# EAGLE board vceg (EAGLE 7.1.0)
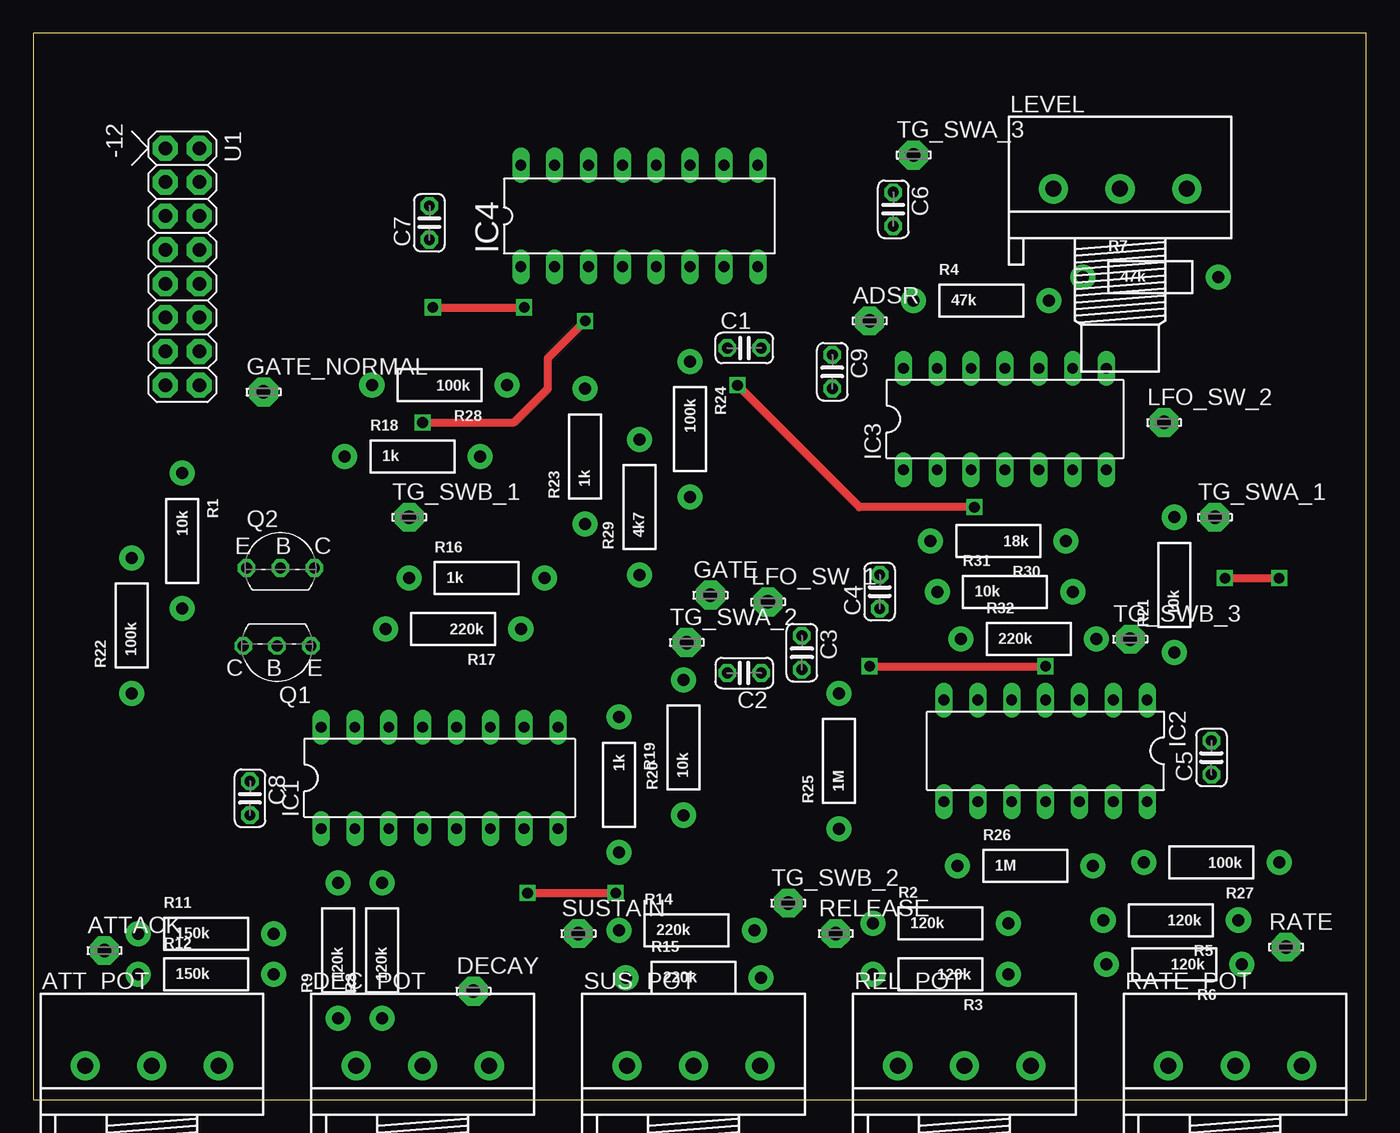
[diagram p0: board, top side]
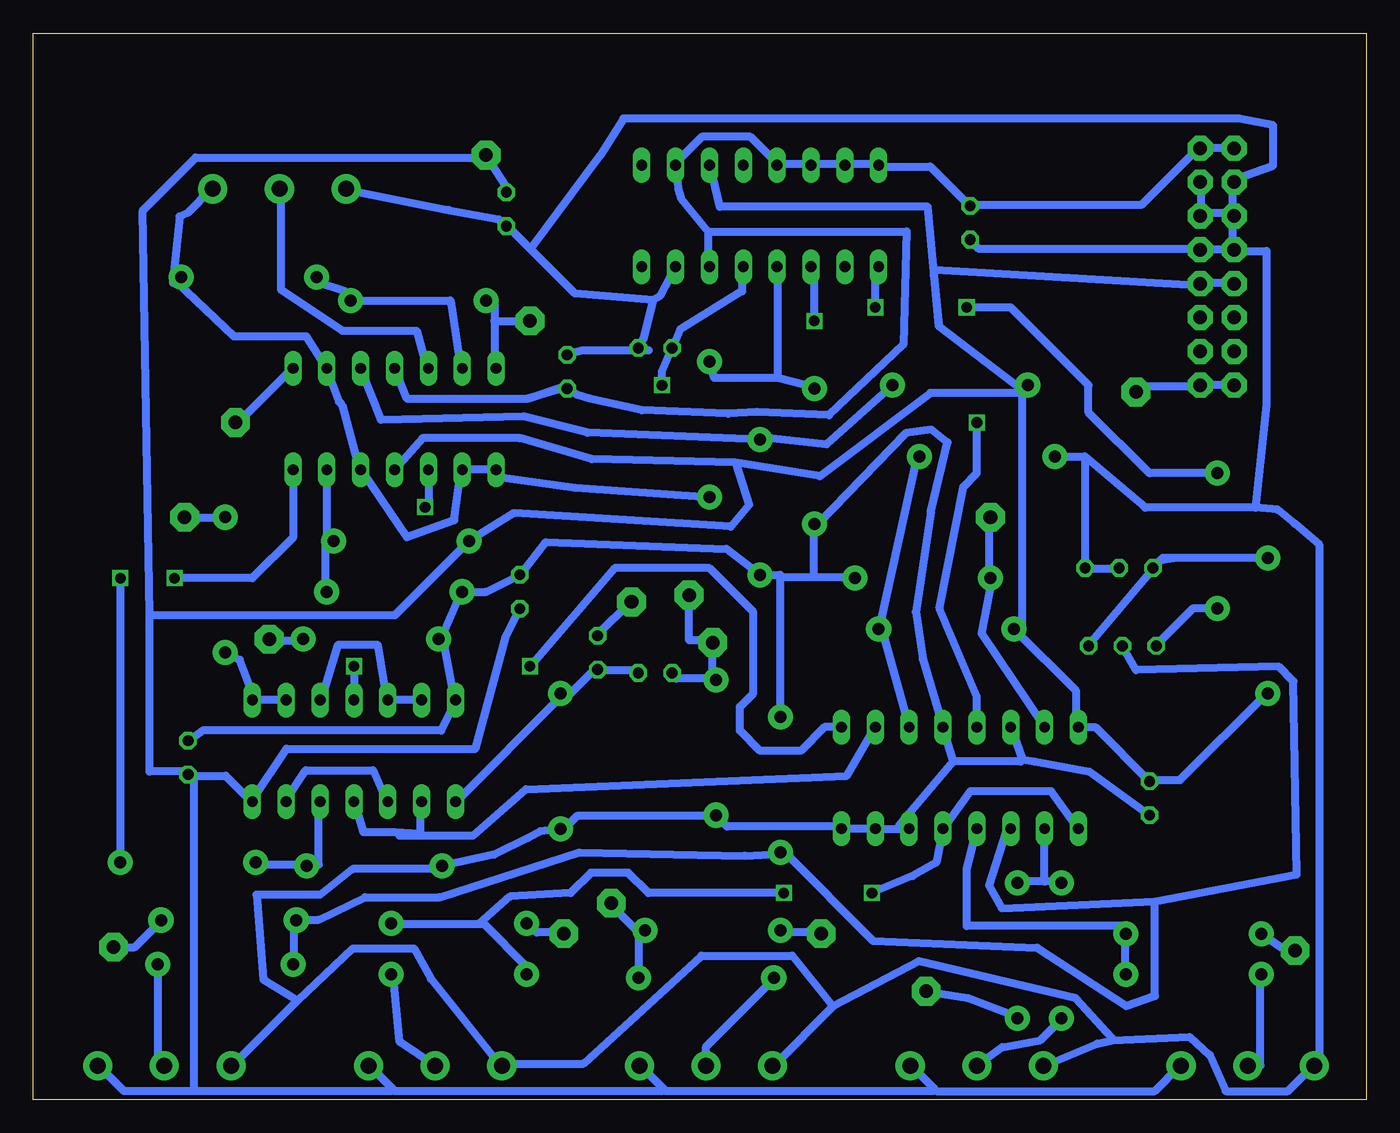
[diagram p1: board, bottom side, seen from below]

Size 100 x 80 mm. Coordinates in mm from the lower left corner, seen from the top.
Outline: 0,0 100,0 100,80 0,80 0,0
Copper layers (1*16): Top 0.035mm / dielectric 1.5mm / Bottom 0.035mm
Design rules "default *": minimum track width 24mil, minimum drill 24mil, track to track 14mil, track to pad 14mil, pad to pad 14mil, via to via 14mil, smd to smd 8mil, copper to edge 0mil, drill to drill 8mil, minimum pad ring 10mil, minimum via ring 8mil, stop-mask expansion 4mil, vias tented up to drill 0mil, thermal gap 10mil

## Footprints (pad centres in the part's own frame; a part is rotated, then mirrored left to right if it is on the bottom)
LSP10 = drill 1.016 pad 2.159 octagon: MP 0,0
3RP/1610N = drill 1.2 pad 2.184: 1 -5,0; 2 0,0; 3 5,0
C025-024X044 = drill 0.813 octagon: 1 -1.27,0; 2 1.27,0
DIL16 = drill 0.813 long: 1 -8.89,-3.81; 2 -6.35,-3.81; 3 -3.81,-3.81; 4 -1.27,-3.81; 5 1.27,-3.81; 6 3.81,-3.81; 7 6.35,-3.81; 8 8.89,-3.81; 9 8.89,3.81; 10 6.35,3.81; 11 3.81,3.81; 12 1.27,3.81; 13 -1.27,3.81; 14 -3.81,3.81; 15 -6.35,3.81; 16 -8.89,3.81
DIL14 = drill 0.813 long: 1 -7.62,-3.81; 2 -5.08,-3.81; 3 -2.54,-3.81; 4 0,-3.81; 5 2.54,-3.81; 6 5.08,-3.81; 7 7.62,-3.81; 8 7.62,3.81; 9 5.08,3.81; 10 2.54,3.81; 11 0,3.81; 12 -2.54,3.81; 13 -5.08,3.81; 14 -7.62,3.81
TO92-CBE = drill 0.813 octagon: B 0,0; C 2.54,0; E -2.54,0
AXIAL-0.4 = drill 0.9 pad 1.88: P$1 -5.08,0; P$2 5.08,0
POWER_16 = drill 1.016 pad 1.88 octagon: 1 -6.35,-1.27; 2 -6.35,1.27; 3 -3.81,-1.27; 4 -3.81,1.27; 5 -1.27,-1.27; 6 -1.27,1.27; 7 1.27,-1.27; 8 1.27,1.27; 9 3.81,-1.27; 10 3.81,1.27; 11 6.35,-1.27; 12 6.35,1.27; 13 8.89,-1.27; 14 8.89,1.27; 15 11.43,-1.27; 16 11.43,1.27

## Placement (x,y rotation side)
ADSR  LSP10  [LSP10]  62.74,58.42 0 top
ATT_POT  50k  [3RP/1610N]  8.89,2.54 0 top
ATTACK  LSP10  [LSP10]  5.33,11.18 0 top
C1  .05  [C025-024X044]  53.34,56.39 0 top
C2  .01  [C025-024X044]  53.34,32 180 top
C3  .01  [C025-024X044]  57.66,33.53 270 top
C4  .1  [C025-024X044]  63.5,38.1 90 top
C5  .1  [C025-024X044]  88.39,25.65 90 top
C6  .1  [C025-024X044]  64.52,66.8 270 top
C7  .1  [C025-024X044]  29.72,65.79 90 top
C8  .1  [C025-024X044]  16.26,22.61 270 top
C9  .1  [C025-024X044]  59.94,54.61 270 top
DEC_POT  50k  [3RP/1610N]  29.21,2.54 0 top
DECAY  LSP10  [LSP10]  33.02,8.13 0 top
GATE  LSP10  [LSP10]  50.8,37.85 0 top
GATE_NORMAL  LSP10  [LSP10]  17.27,53.09 0 top
IC1  4052N  [DIL16]  30.48,24.13 0 top
IC2  4001N  [DIL14]  75.95,26.16 180 top
IC3  TL074P  [DIL14]  72.9,51.05 0 top
IC4  LM13700N  [DIL16]  45.47,66.29 0 top
LEVEL  50k  [3RP/1610N]  81.53,68.33 0 top
LFO_SW_1  LSP10  [LSP10]  55.12,37.34 0 top
LFO_SW_2  LSP10  [LSP10]  84.84,50.8 0 top
Q1  2N3906INLINE  [TO92-CBE]  18.29,34.04 180 top
Q2  2N3906INLINE  [TO92-CBE]  18.54,39.88 0 top
R1  10k  [AXIAL-0.4]  11.18,41.91 270 top
R2  120k  [AXIAL-0.4]  68.07,13.21 0 top
R3  120k  [AXIAL-0.4]  68.07,9.4 180 top
R4  47k  [AXIAL-0.4]  71.12,59.94 0 top
R5  120k  [AXIAL-0.4]  85.34,13.46 180 top
R6  120k  [AXIAL-0.4]  85.6,10.16 180 top
R7  47k  [AXIAL-0.4]  83.82,61.72 0 top
R8  120k  [AXIAL-0.4]  26.16,11.18 90 top
R9  120k  [AXIAL-0.4]  22.86,11.18 90 top
R11  150k  [AXIAL-0.4]  12.95,12.45 0 top
R12  150k  [AXIAL-0.4]  12.95,9.4 0 top
R14  220k  [AXIAL-0.4]  49.02,12.7 0 top
R15  220k  [AXIAL-0.4]  49.53,9.14 0 top
R16  1k  [AXIAL-0.4]  33.27,39.12 0 top
R17  220k  [AXIAL-0.4]  31.5,35.31 180 top
R18  1k  [AXIAL-0.4]  28.45,48.26 0 top
R19  1k  [AXIAL-0.4]  43.94,23.62 270 top
R20  10k  [AXIAL-0.4]  48.77,26.42 90 top
R21  10k  [AXIAL-0.4]  85.6,38.61 90 top
R22  100k  [AXIAL-0.4]  7.37,35.56 90 top
R23  1k  [AXIAL-0.4]  41.4,48.26 90 top
R24  100k  [AXIAL-0.4]  49.28,50.29 270 top
R25  1M  [AXIAL-0.4]  60.45,25.4 90 top
R26  1M  [AXIAL-0.4]  74.42,17.53 0 top
R27  100k  [AXIAL-0.4]  88.39,17.78 180 top
R28  100k  [AXIAL-0.4]  30.48,53.59 180 top
R29  4k7  [AXIAL-0.4]  45.47,44.45 90 top
R30  18k  [AXIAL-0.4]  72.39,41.91 180 top
R31  10k  [AXIAL-0.4]  72.9,38.1 0 top
R32  220k  [AXIAL-0.4]  74.68,34.54 0 top
RATE  LSP10  [LSP10]  93.98,11.43 0 top
RATE_POT  50k  [3RP/1610N]  90.17,2.54 0 top
REL_POT  50k  [3RP/1610N]  69.85,2.54 0 top
RELEASE  LSP10  [LSP10]  60.2,12.45 0 top
SUS_POT  50k  [3RP/1610N]  49.53,2.54 0 top
SUSTAIN  LSP10  [LSP10]  40.89,12.45 0 top
TG_SWA_1  LSP10  [LSP10]  88.65,43.69 0 top
TG_SWA_2  LSP10  [LSP10]  49.02,34.29 0 top
TG_SWA_3  LSP10  [LSP10]  66.04,70.87 0 top
TG_SWB_1  LSP10  [LSP10]  28.19,43.69 0 top
TG_SWB_2  LSP10  [LSP10]  56.64,14.73 0 top
TG_SWB_3  LSP10  [LSP10]  82.3,34.54 0 top
U1  POWER  [POWER_16]  11.18,65.02 270 top

## Library data of the parts
ADSR ATTACK DECAY GATE GATE_NORMAL LFO_SW_1 LFO_SW_2 RATE RELEASE SUSTAIN TG_SWA_1-TG_SWA_3 TG_SWB_1-TG_SWB_3 = solpad
ATT_POT DEC_POT LEVEL RATE_POT REL_POT SUS_POT = pot
C1-C9 = rcl
IC1 IC2 = 40xx
IC3 = linear
IC4 = synthdiy
Q1 Q2 = bt_transistor
R1-R9 R11 R12 R14-R32 = SparkFun-Resistors
U1 = eurorack

## Nets
+12V: ATT_POT.3 C4.1 C5.1 C6.1 C8.1 DEC_POT.3 IC1.16 IC2.14 IC3.4 IC4.11 R17.P$2 R22.P$1 R28.P$2 R30.P$2 RATE_POT.3 REL_POT.3 SUS_POT.3 TG_SWA_3.MP U1.9 U1.10
-12V: C7.2 C9.2 IC3.11 IC4.6 IC4.10 IC4.13 IC4.14 IC4.15 IC4.16 U1.1 U1.2
GND: ATT_POT.1 C1.2 C4.2 C5.2 C6.2 C7.1 C8.2 C9.1 DEC_POT.1 IC1.6 IC1.7 IC1.8 IC1.12 IC1.14 IC2.7 IC4.7 LEVEL.1 Q2.B Q2.C R16.P$2 R18.P$1 R19.P$1 R20.P$1 R23.P$1 R25.P$1 R26.P$1 R29.P$1 R31.P$1 R32.P$1 RATE_POT.1 REL_POT.1 SUS_POT.1 U1.3 U1.4 U1.5 U1.6 U1.7 U1.8
N$1: R2.P$1 RELEASE.MP
N$2: IC1.1 IC1.5 R2.P$2 R3.P$2
N$3: R3.P$1 REL_POT.2
N$4: R5.P$1 RATE.MP
N$5: IC1.3 Q1.B R5.P$2 R6.P$2 R19.P$2
N$6: R6.P$1 RATE_POT.2
N$7: DECAY.MP R8.P$1
N$8: IC1.2 R8.P$2 R9.P$2
N$9: DEC_POT.2 R9.P$1
N$10: ATTACK.MP R11.P$1
N$11: IC1.4 R11.P$2 R12.P$2
N$12: ATT_POT.2 R12.P$1
N$13: R14.P$1 SUSTAIN.MP
N$14: IC1.15 R16.P$1 TG_SWB_1.MP
N$15: R15.P$1 SUS_POT.2
N$16: IC1.11 R17.P$1 R18.P$2
N$17: IC1.10 IC2.9 IC2.11
N$18: IC2.1 IC2.2 R21.P$1
N$19: IC2.3 IC2.5 IC2.6
N$20: IC1.9 IC2.4
N$21: Q1.C R1.P$2
N$22: Q1.E Q2.E R22.P$2
N$23: GATE_NORMAL.MP U1.15 U1.16
N$24: IC4.4 R23.P$2 R24.P$1
N$25: C2.1 C3.2 IC2.8 R25.P$2
N$26: IC3.1 IC3.2 IC3.5 IC3.9 LEVEL.3 R7.P$2 R24.P$2
N$27: C2.2 GATE.MP R20.P$2 TG_SWA_2.MP
N$28: C1.1 IC3.3 IC4.5
N$29: IC3.7 R27.P$1
N$30: IC2.10 IC2.13
N$31: IC2.12 R26.P$2 R27.P$2
N$32: IC3.8 LFO_SW_2.MP
N$33: IC3.6 R30.P$1 R31.P$2
N$34: IC3.10 R28.P$1 R29.P$2
N$35: C3.1 LFO_SW_1.MP
N$36: R14.P$2 R15.P$2 TG_SWB_2.MP
N$37: R32.P$2 TG_SWB_3.MP
N$38: R21.P$2 TG_SWA_1.MP
N$39: IC4.1 R1.P$1
N$40: IC3.12 LEVEL.2
N$41: IC1.13 IC4.3
N$42: ADSR.MP IC3.14 R4.P$1
N$43: IC3.13 R4.P$2 R7.P$1

## Tracks (layer width: path | path; a pad name or v marks a point on that pad's centre or on a via)
+12V
  Bottom 0.61: R22.P$1 7.46,30.48 13.97,23.97 16.03,23.97 C8.1 20.32,27.94 IC1.16 21.75,28.1 21.75,30.64 R17.P$2 25.84,35.56 25.84,52.86 R28.P$2 | U1.9 10,61.28 12.38,61.28 U1.10 12.7,61.12 32.38,62.26 32.42,61.75 32.07,58.04 | 32.07,58.04 32.89,66.99 48.48,66.99 49.21,70.01 IC4.11 | 32.07,58.04 25.72,53.18 R28.P$2 | 47.31,47.78 40.99,46.77 32.7,53.02 25.88,53.02 R28.P$2 | 47.31,47.78 58.1,48.04 63.5,49.62 70.8,49.62 72.87,47.31 IC3.4 | 47.31,47.78 46.29,44.61 47.66,42.99 63.94,44.01 R30.P$2 72.87,36.35 91.28,36.35 | C6.1 64.83,68.07 64.58,68.55 65.72,70.33 TG_SWA_3.MP 66.29,70.67 87.82,70.67 91.79,66.71 91.28,36.35 | C5.1 88.27,24.29 85.57,24.29 83.66,22.38 IC2.14 83.5,22.54 80.99,26.32 66.83,26.32 64.55,34.77 C4.1 | 91.28,36.35 91.28,24.61 88.58,24.61 C5.1 | 32.38,0.79 34.13,2.54 DEC_POT.3 | 32.38,0.79 32.23,0.64 15.88,0.64 13.97,2.54 ATT_POT.3 | 52.7,0.79 52.55,0.64 32.54,0.64 32.38,0.79 | 52.7,0.79 54.45,2.54 SUS_POT.3 | 73.03,0.79 72.87,0.64 52.86,0.64 52.7,0.79 | 73.03,0.79 74.77,2.54 REL_POT.3 | 87.95,0.64 73.18,0.64 73.03,0.79 | 87.95,0.64 93.19,0.64 95.09,2.54 RATE_POT.3 | 87.95,0.64 87.95,24.13 C5.1
-12V
  Bottom 0.61: 62.9,52.61 60.23,53.5 C9.2 | 62.9,52.61 71.98,52.61 72.87,54.77 IC3.11 | 49.37,65.12 51.4,67.6 51.63,68.36 51.75,70.01 IC4.10 51.75,70.33 49.85,72.23 46.2,72.23 44.29,70.33 IC4.13 44.13,70.17 41.91,70.17 IC4.14 41.59,70.17 39.37,70.17 IC4.15 39.05,70.17 36.83,70.17 IC4.16 36.51,70.01 32.7,70.01 29.84,67.15 C7.2 29.53,67.15 16.83,67.15 12.7,71.28 U1.2 12.38,71.44 10,71.44 U1.1 | 49.37,65.12 49.37,62.55 IC4.6 | 49.37,65.12 34.48,65.12 34.73,56.64 40.29,51.34 45.72,51.59 47.88,51.47 54.36,51.72 58.29,52.61 59.18,52.86 59.94,53.47 62.9,52.61
GND
  Bottom 0.61: LEVEL.1 76.52,68.26 68.83,66.74 65.09,66.04 C6.2 64.77,65.88 62.71,63.82 | 53.5,59.98 52.99,60.29 IC4.7 | 53.5,59.98 54.26,57.02 C1.2 53.82,56.2 58.8,56.2 C9.1 | 62.71,63.82 59.37,60.48 53.5,59.98 | Q2.B 18.57,39.85 20.95,39.85 Q2.C 21.11,40.16 21.11,48.26 | R18.P$1 21.11,48.26 | C7.1 29.69,64.45 29.05,63.82 12.54,63.82 U1.8 12.22,63.82 10,63.82 U1.7 | U1.5 10,66.2 10,63.98 U1.7 | U1.5 10,66.52 10,68.74 U1.3 9.84,69.06 6.99,70.07 6.99,73.09 9.53,73.6 55.72,73.6 57.5,70.8 62.71,63.82 | U1.5 10.32,66.52 12.22,66.52 U1.6 12.38,66.67 12.38,68.74 U1.4 | 21.11,48.26 16.57,44.42 8.32,44.42 | 8.32,44.42 7.49,52.1 7.49,63.66 9.68,63.66 U1.7 | 43.97,39.21 43.97,39.37 R29.P$1 45.72,39.53 48.01,41.31 61.56,41.81 C4.2 66.04,38.1 R31.P$1 67.94,37.94 69.22,34.96 69.28,34.7 R32.P$1 69.18,34.04 68.42,30 IC2.7 68.42,29.69 69.41,27.69 87.31,27.69 88.27,26.99 C5.2 | 43.97,39.21 43.97,28.73 R19.P$1 | 43.97,39.21 41.43,39.21 | 41.43,39.21 38.42,39.21 R16.P$2 | 41.43,39.21 41.43,43.18 R23.P$1 41.12,43.18 34.54,50.01 32.61,50.26 31.4,49.31 32.67,44.1 33.78,36.58 33.27,33.02 IC1.12 30.96,25.37 | 19.05,4.45 20.19,4.19 24.13,2.54 DEC_POT.1 | 19.05,4.45 13.24,4.7 11.72,3.33 10.54,0.64 5.87,0.64 3.97,2.54 ATT_POT.1 3.65,2.7 3.49,2.7 3.49,41.59 5.37,43.21 6.64,44.26 8.32,44.42 | 40.01,6.99 33.56,10.38 21.78,7.59 19.05,4.6 19.05,4.45 | 40.01,6.99 44.45,2.54 SUS_POT.1 | 80.17,7.46 85.09,2.54 RATE_POT.1 | 80.17,7.46 76.04,11.34 71.44,11.34 70.17,9.05 64.93,2.54 REL_POT.1 64.61,2.7 58.74,2.7 49.88,10.79 43.05,10.79 40.01,6.99 | C8.2 20.8,24.61 24.86,25.37 25.78,25.53 | IC1.14 25.78,25.53
  Bottom 0.61: 30.96,25.37 25.94,25.37 25.78,25.53 | 35.08,20.32 IC1.7 IC1.8 39.53,20.48 47.94,20.48 48.74,21.27 R20.P$1 49.05,21.27 59.21,21.27 60.17,20.32 R25.P$1 60.48,20.32 61.94,20.13 62.9,19.62 65.41,18.38 R26.P$1 69.53,17.3 76.04,17.3 78.49,15.37 83.25,15.37 82.74,9.02 80.17,7.46 | 35.08,20.32 IC1.6 | 30.96,25.37 35.08,20.48 35.08,20.32
N$1
  Bottom 0.61: R2.P$1 62.87,13.18 62.23,12.54 60.33,12.54 RELEASE.MP
N$2  (via drill 0.8)
  Top 0.61: v37.08,15.49 v43.69,15.49
  Bottom 0.61: IC1.1 23.65,23.15 29.69,23.15 IC1.5 32.26,17.78 34.04,16.76 v37.08,15.49 | 66.55,13.18 73.03,13.18 R2.P$2 | 66.55,13.18 66.2,13.18 63.02,10 R3.P$2 | v43.69,15.49 53.85,15.49 55.37,17.02 58.17,17.02 59.69,15.49 64.23,15.24 66.55,13.18
N$3
  Bottom 0.61: REL_POT.2 72.52,4.32 73.03,9.84 R3.P$1
N$4
  Bottom 0.61: RATE.MP 92.39,11.43 90.49,13.34 R5.P$1
N$5
  Bottom 0.61: 15.84,14.86 27.34,14.35 28.29,16.07 27.02,20.07 IC1.3 | 15.84,14.86 5.21,16.89 5.46,31.37 6.57,32.48 17.27,32.23 18.26,33.97 Q1.B | R6.P$2 80.49,10.16 80.49,13.18 80.33,13.18 R5.P$2 80.17,13.49 78.58,13.49 75.12,15.18 69.53,15.18 59.05,18.54 46.64,18.29 43.97,18.41 R19.P$2 43.66,18.57 36.99,11.91 24.67,11.4 18,7.02 15.84,7.78 15.84,14.86
N$6
  Bottom 0.61: RATE_POT.2 90.65,2.54 90.65,10.16 R6.P$1
N$7
  Bottom 0.61: DECAY.MP 29.91,7.62 26.19,6.19 R8.P$1
N$8
  Bottom 0.61: 24.13,16.35 IC1.2 | 24.13,16.35 22.86,16.35 R9.P$2 | 24.13,16.35 26.04,16.35 R8.P$2
N$9
  Bottom 0.61: DEC_POT.2 27.3,3.94 24.45,4.45 22.86,6.03 R9.P$1
N$10
  Bottom 0.61: R11.P$1 6.19,11.27 5.4,11.27 ATTACK.MP
N$11
  Bottom 0.61: IC1.4 29.97,17.27 29.97,13.02 18.1,13.02 R11.P$2 18.1,12.7 18.1,9.53 R12.P$2
N$12
  Bottom 0.61: ATT_POT.2 7.94,2.54 7.94,9.37 R12.P$1
N$13
  Bottom 0.61: R14.P$1 43.81,12.54 40.48,12.54 SUSTAIN.MP
N$14
  Bottom 0.61: IC1.15 28.86,34.96 28.1,39.05 R16.P$1 28.26,39.37 28.26,43.66 TG_SWB_1.MP
N$15
  Bottom 0.61: SUS_POT.2 49.53,3.97 44.45,9.05 R15.P$1
N$16
  Bottom 0.61: 36.32,35.24 IC1.11 | 36.32,35.24 36.51,35.24 R17.P$1 | R18.P$2 33.66,48.26 36.45,35.66 36.16,35.4 36.32,35.24
N$17
  Bottom 0.61: 70.93,19.97 72.87,20.07 75.25,20.07 75.88,22.23 IC2.11 | 70.93,19.97 70.96,22.23 IC2.9 | IC1.10 38.96,24.29 63.06,23.27 67.02,19.81 72.55,19.81 70.93,19.97
N$18
  Bottom 0.61: IC2.2 81.12,30 83.5,30 IC2.1 83.5,30.32 84.52,32.99 85.57,33.5 R21.P$1
N$19
  Bottom 0.61: IC2.6 70.96,30 73.34,30 IC2.5 73.5,30.16 74.14,34.1 77.15,34.1 78.42,30 IC2.3
N$20  (via drill 0.8)
  Top 0.61: v62.74,32.51 v75.95,32.51
  Bottom 0.61: IC1.9 40.64,27.94 42.42,26.16 45.47,26.16 46.99,27.69 46.99,29.46 45.97,30.48 45.97,36.58 49.28,39.88 56.39,39.88 v62.74,32.51 | v75.95,32.51 IC2.4
N$21
  Bottom 0.61: R1.P$2 13.02,36.83 15.72,34.13 Q1.C
N$22
  Bottom 0.61: Q2.E 15.24,40.64 14.45,40.64 | R22.P$2 14.45,40.64 | Q1.E 20.8,34.13 15.46,40.48 14.45,40.64
N$23
  Bottom 0.61: U1.15 10,53.66 12.38,53.66 U1.16 12.7,53.5 16.83,53.5 17.14,53.18 GATE_NORMAL.MP
N$24
  Bottom 0.61: 44.13,54.13 42.1,53.59 R23.P$2 | 44.13,54.13 44.13,62.39 IC4.4 | 44.13,54.13 48.9,54.13 R24.P$1
N$25
  Bottom 0.61: C2.1 54.61,32.07 54.77,32.23 57.63,32.23 C3.2 57.94,32.23 59.69,30.48 R25.P$2 60.48,30.48 60.48,30.16 68.26,22.38 IC2.8
N$26
  Bottom 0.61: LEVEL.3 86.68,68.26 88.42,66.52 89.03,66.26 89.53,61.28 R7.P$2 89.22,61.28 84.93,57.24 79.5,57.24 78.11,55.09 IC3.9 77.95,54.77 77.06,52.36 76.83,52.1 75.56,47.31 IC3.5 75.25,46.99 71.98,42.2 68.42,43.47 67.94,46.99 IC3.2 67.79,47.31 65.41,47.31 IC3.1 65.09,46.99 64.77,46.67 59.37,45.91 R24.P$2
N$27
  Bottom 0.61: C2.2 52.07,31.91 51.75,31.59 48.9,31.59 R20.P$2 49.05,31.75 49.05,34.29 TG_SWA_2.MP 49.21,34.45 50.8,34.45 GATE.MP
N$28  (via drill 0.8)
  Top 0.61: v70.61,44.45 61.98,44.45 v52.83,53.59
  Bottom 0.61: IC4.5 46.83,62.39 46.83,60.64 51.47,57.78 C1.1 52.83,54.61 v52.83,53.59 | IC3.3 70.36,44.7 v70.61,44.45
N$29  (via drill 0.8)
  Top 0.61: v89.41,39.12 v93.47,39.12
  Bottom 0.61: IC3.7 80.52,42.16 83.57,39.12 v89.41,39.12 | v93.47,39.12 R27.P$1
N$30
  Bottom 0.61: IC2.10 73.5,22.38 74.52,24.7 79.57,24.7 81.12,22.38 IC2.13
N$31
  Bottom 0.61: IC2.12 78.58,22.23 78.58,17.62 79.38,17.62 R26.P$2 79.69,17.62 83.03,17.62 83.19,17.78 R27.P$2
N$32
  Bottom 0.61: LFO_SW_2.MP 84.61,50.8 80.64,54.77 IC3.8
N$33
  Bottom 0.61: IC3.6 77.95,47.15 77.95,41.91 R30.P$1 78.11,41.75 78.11,38.1 R31.P$2
N$34
  Bottom 0.61: IC3.10 75.41,54.77 73.91,50.99 63.18,51.24 58.42,50.04 R29.P$2 45.24,49.69 40.48,49.18 R28.P$1
N$35
  Bottom 0.61: C3.1 57.63,34.92 55.24,37.31 LFO_SW_1.MP
N$36
  Bottom 0.61: 56.67,14.76 TG_SWB_2.MP 56.52,14.45 54.61,12.54 R14.P$2 54.13,12.38 54.61,12.38 R15.P$2
N$37
  Bottom 0.61: R32.P$2 79.92,34.45 81.44,34.45 TG_SWB_3.MP
N$38
  Bottom 0.61: R21.P$2 85.72,43.66 88.58,43.66 TG_SWA_1.MP
N$39  (via drill 0.8)
  Top 0.61: v29.97,59.44 v36.83,59.44
  Bottom 0.61: R1.P$1 16.26,46.99 20.83,51.56 20.83,53.59 26.67,59.44 v29.97,59.44 | v36.83,59.44 36.83,62.23 IC4.1
N$40
  Bottom 0.61: IC3.12 70.48,54.93 71.25,57.69 76.8,57.69 81.44,60.8 81.44,68.26 LEVEL.2
N$41  (via drill 0.8)
  Top 0.61: v29.21,50.8 36.07,50.8 38.61,53.34 38.61,55.63 v41.4,58.42
  Bottom 0.61: IC1.13 29.21,30.23 32,36.83 30.23,45.97 29.21,46.99 v29.21,50.8 | v41.4,58.42 41.4,62.23 IC4.3
N$42
  Bottom 0.61: 65.41,58.42 65.41,59.69 R4.P$1 | 65.41,58.42 65.41,54.93 IC3.14 | 65.41,58.42 ADSR.MP
N$43
  Bottom 0.61: IC3.13 67.94,54.93 68.71,59.94 R4.P$2 76.36,59.85 76.58,60.61 78.87,61.37 R7.P$1